# EAGLE board DINx1 (EAGLE 6.4)
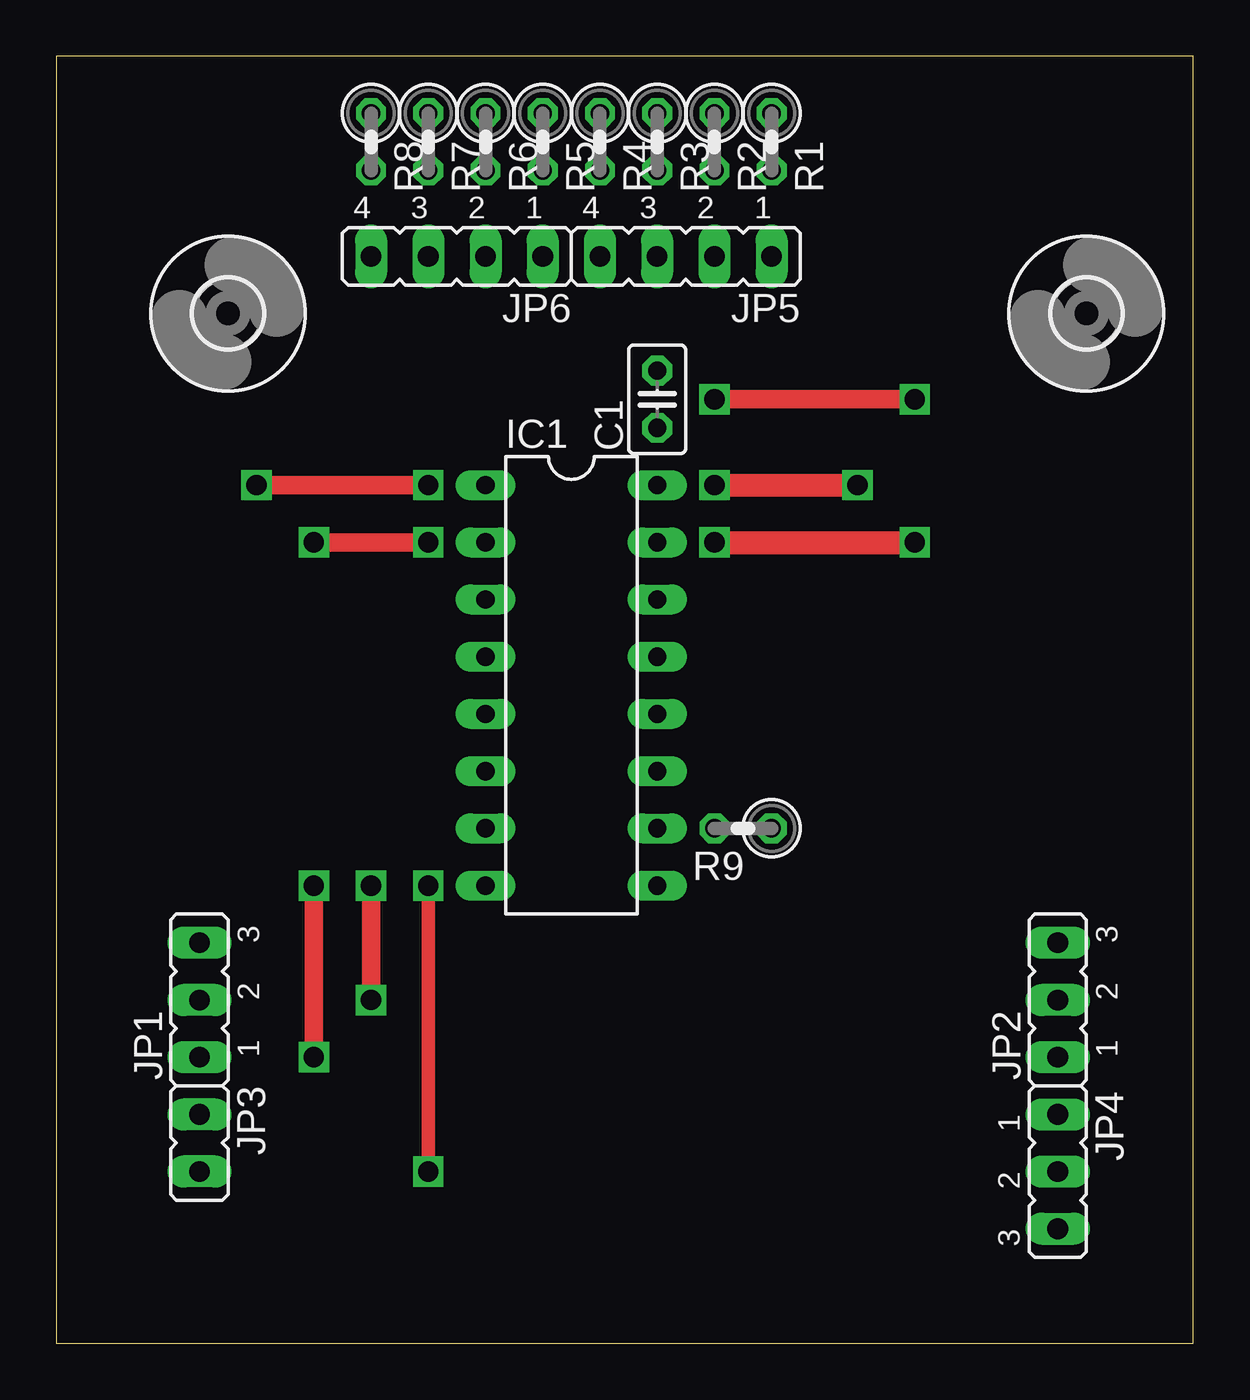
[diagram p0: board, top side]
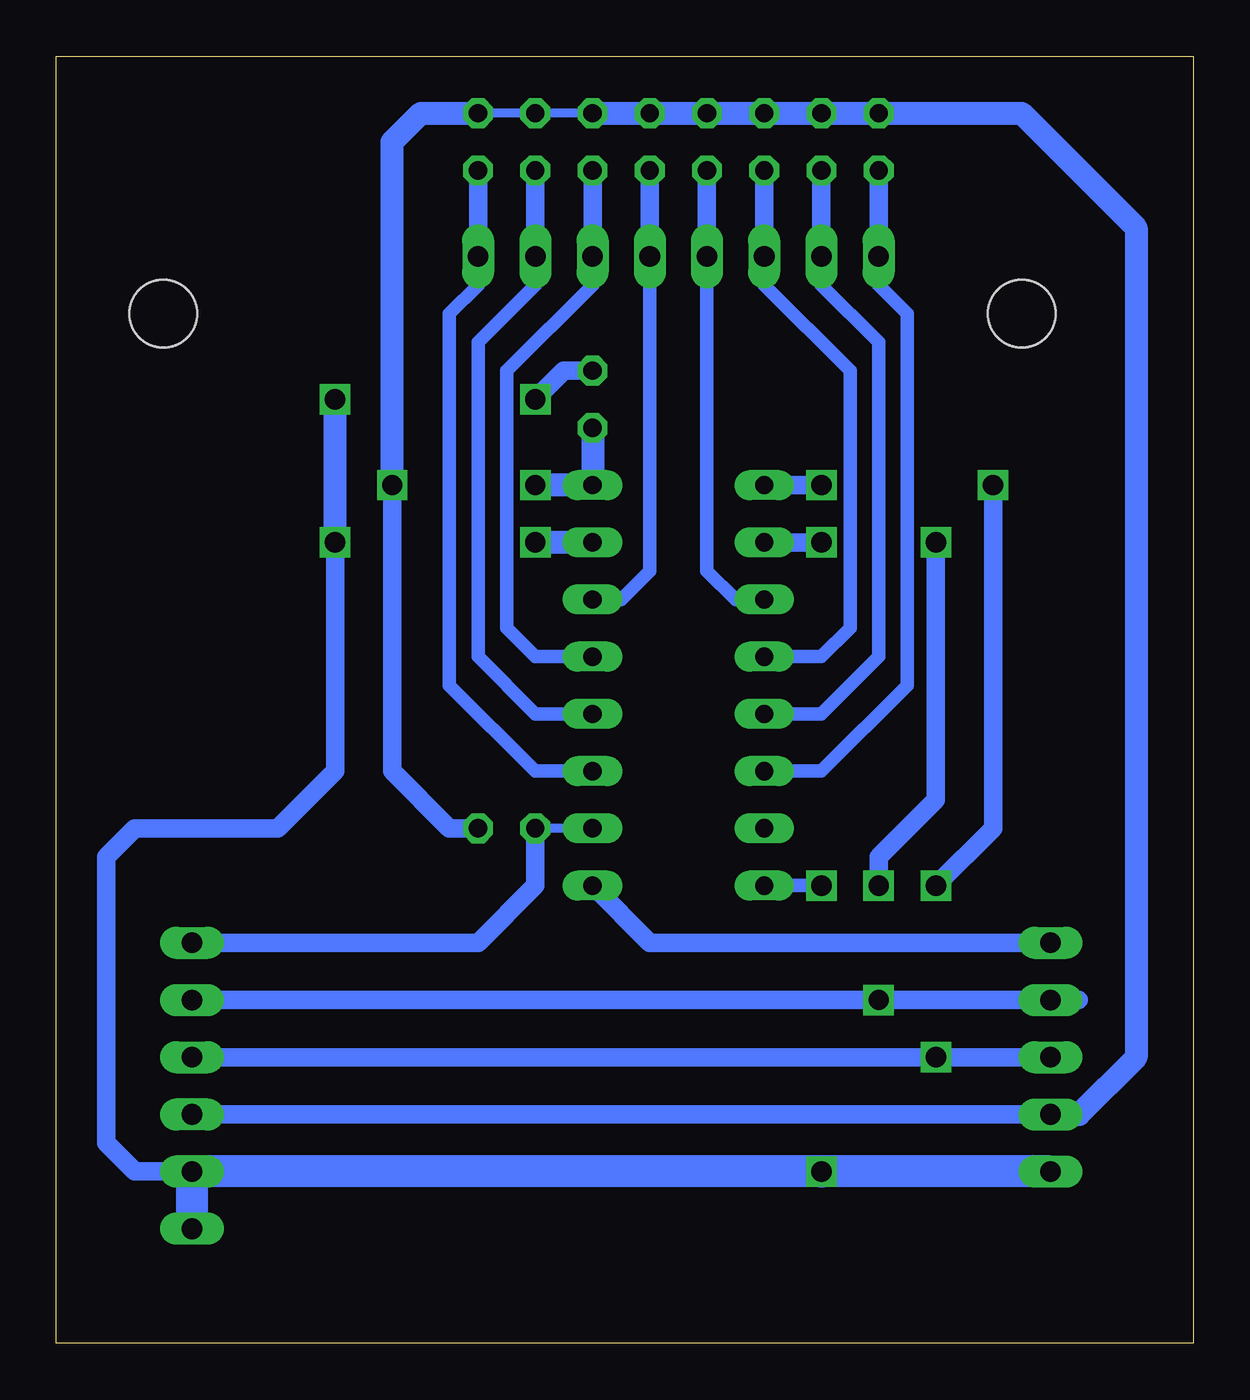
[diagram p1: board, bottom side, seen from below]

Size 50.47 x 57.14 mm. Coordinates in mm from the lower left corner, seen from the top.
Outline: 0,0 50.47,0 50.47,57.14 0,57.14 0,0
Copper layers (1*16): Top 0.035mm / dielectric 1.5mm / Bottom 0.035mm
Design rules "default": minimum track width 10mil, minimum drill 24mil, track to track 8mil, track to pad 8mil, pad to pad 8mil, via to via 8mil, smd to smd 8mil, copper to edge 40mil, drill to drill 8mil, minimum pad ring 10mil, minimum via ring 8mil, stop-mask expansion 4mil, vias tented up to drill 0mil, thermal gap 10mil

## Footprints (pad centres in the part's own frame; a part is rotated, then mirrored left to right if it is on the bottom)
C025-025X050 = drill 0.813 octagon: 1 -1.27,0; 2 1.27,0
DIL16 = drill 0.813 long: 1 -8.89,-3.81; 2 -6.35,-3.81; 3 -3.81,-3.81; 4 -1.27,-3.81; 5 1.27,-3.81; 6 3.81,-3.81; 7 6.35,-3.81; 8 8.89,-3.81; 9 8.89,3.81; 10 6.35,3.81; 11 3.81,3.81; 12 1.27,3.81; 13 -1.27,3.81; 14 -3.81,3.81; 15 -6.35,3.81; 16 -8.89,3.81
JP2 = drill 0.914 long: 1 -2.54,0; 2 0,0; 3 2.54,0
JP1 = drill 0.914 long: 1 0,-1.27; 2 0,1.27
JP4 = drill 0.914 long: 1 -3.81,0; 2 -1.27,0; 3 1.27,0; 4 3.81,0
0207/2V = drill 0.813 octagon: 1 -1.27,0; 2 1.27,0
3,0 = hole 3: 0,0

## Placement (x,y rotation side)
C1  [C025-025X050]  26.67,41.91 90 top
IC1  74HC165N  [DIL16]  22.86,29.21 270 top
JP1  [JP2]  6.35,15.24 90 top
JP2  [JP2]  44.45,15.24 90 top
JP3  [JP1]  6.35,8.89 180 top
JP4  [JP2]  44.45,7.62 270 top
JP5  [JP4]  27.94,48.26 180 top
JP6  [JP4]  17.78,48.26 180 top
R1  [0207/2V]  31.75,53.34 270 top
R2  [0207/2V]  29.21,53.34 270 top
R3  [0207/2V]  26.67,53.34 270 top
R4  [0207/2V]  24.13,53.34 270 top
R5  [0207/2V]  21.59,53.34 270 top
R6  [0207/2V]  19.05,53.34 270 top
R7  [0207/2V]  16.51,53.34 270 top
R8  [0207/2V]  13.97,53.34 270 top
R9  [0207/2V]  30.48,22.86 180 top
U$1  [3,0]  7.62,45.72 0 top
U$2  [3,0]  45.72,45.72 0 top

## Library data of the parts
C1 R1-R9 = rcl
IC1 = 74xx-eu
JP1-JP6 = jumper
U$1 U$2 = holes

## Nets
+5V: C1.1 IC1.16 JP3.1 JP4.1 R1.1 R2.1 R3.1 R4.1 R5.1 R6.1 R7.1 R8.1 R9.1
GND: C1.2 IC1.8 IC1.15 JP3.2 JP4.2 JP4.3
N$1: IC1.11 JP5.1 R1.2
N$2: IC1.12 JP5.2 R2.2
N$3: IC1.3 JP6.1 R5.2
N$4: IC1.13 JP5.3 R3.2
N$5: IC1.14 JP5.4 R4.2
N$6: IC1.4 JP6.2 R6.2
N$7: IC1.5 JP6.3 R7.2
N$8: IC1.6 JP6.4 R8.2
N$9: IC1.9 JP1.3
N$10: IC1.2 JP1.2 JP2.2
N$11: IC1.1 JP1.1 JP2.1
N$13: IC1.10 JP2.3 R9.2

## Tracks (layer width: path | path; a pad name or v marks a point on that pad's centre or on a via)
+5V  (via drill 0.9)
  Top 1.016: v29.21,38.1 v35.56,38.1
  Bottom 0.406: R1.1 R2.1 R3.1 R4.1 R5.1 | R5.1 R8.1 R7.1 R6.1 R5.1
  Bottom 0.813: JP4.1 JP3.1 | R9.1 33.02,22.86 35.56,25.4 v35.56,38.1
  Bottom 1.016: R3.1 7.62,54.61 2.54,49.53 2.54,12.7 5.08,10.16 JP3.1 | C1.1 IC1.16 v29.21,38.1 | v35.56,38.1 35.56,53.34 34.29,54.61 R1.1
GND  (via drill 0.9)
  Top 0.61: v16.51,20.32 v16.51,7.62
  Top 0.813: v29.21,41.91 v38.1,41.91
  Top 1.016: v29.21,35.56 v38.1,35.56
  Bottom 0.61: IC1.8 v16.51,20.32
  Bottom 0.813: C1.2 27.94,43.18 v29.21,41.91 | v38.1,35.56 38.1,25.4 40.64,22.86 46.99,22.86 48.26,21.59 48.26,8.89 46.99,7.62 JP4.2
  Bottom 1.016: IC1.15 v29.21,35.56 | v38.1,35.56 v38.1,41.91
  Bottom 1.422: JP3.2 v16.51,7.62 JP4.2 JP4.3
N$1
  Bottom 0.61: JP5.1 31.75,46.99 33.02,45.72 33.02,29.21 29.21,25.4 IC1.11
  Bottom 0.813: R1.2 JP5.1
N$2
  Bottom 0.61: IC1.12 29.21,27.94 31.75,30.48 31.75,44.45 29.21,46.99 JP5.2
  Bottom 0.813: R2.2 JP5.2
N$3
  Bottom 0.61: IC1.3 20.32,33.02 21.59,34.29 JP6.1
  Bottom 0.813: R5.2 JP6.1
N$4
  Bottom 0.61: JP5.3 26.67,46.99 30.48,43.18 30.48,31.75 29.21,30.48 IC1.13
  Bottom 0.813: R3.2 JP5.3
N$5
  Bottom 0.61: JP5.4 24.13,34.29 25.4,33.02 IC1.14
  Bottom 0.813: R4.2 JP5.4
N$6
  Bottom 0.61: IC1.4 16.51,30.48 15.24,31.75 15.24,43.18 19.05,46.99 JP6.2
  Bottom 0.813: R6.2 JP6.2
N$7
  Bottom 0.61: JP6.3 16.51,46.99 13.97,44.45 13.97,30.48 16.51,27.94 IC1.5
  Bottom 0.813: R7.2 JP6.3
N$8
  Bottom 0.61: IC1.6 16.51,25.4 12.7,29.21 12.7,45.72 13.97,46.99 JP6.4
  Bottom 0.813: R8.2 JP6.4
N$9
  Bottom 0.813: JP1.3 24.13,17.78 IC1.9
N$10  (via drill 0.9)
  Top 0.813: v16.51,35.56 v11.43,35.56 | v13.97,20.32 v13.97,15.24
  Bottom 0.813: JP2.2 v13.97,15.24 JP1.2 5.08,15.24 | IC1.2 v16.51,35.56 | v11.43,35.56 11.43,24.13 13.97,21.59 v13.97,20.32
N$11  (via drill 0.9)
  Top 0.813: v16.51,38.1 v8.89,38.1 | v11.43,20.32 v11.43,12.7
  Bottom 0.813: IC1.1 v16.51,38.1 | v8.89,38.1 8.89,22.86 v11.43,20.32 | JP1.1 v11.43,12.7 JP2.1
N$13
  Bottom 0.406: IC1.10 R9.2
  Bottom 0.813: JP2.3 31.75,17.78 29.21,20.32 R9.2